# EAGLE board MP_PSU_big (EAGLE 9.7.0)
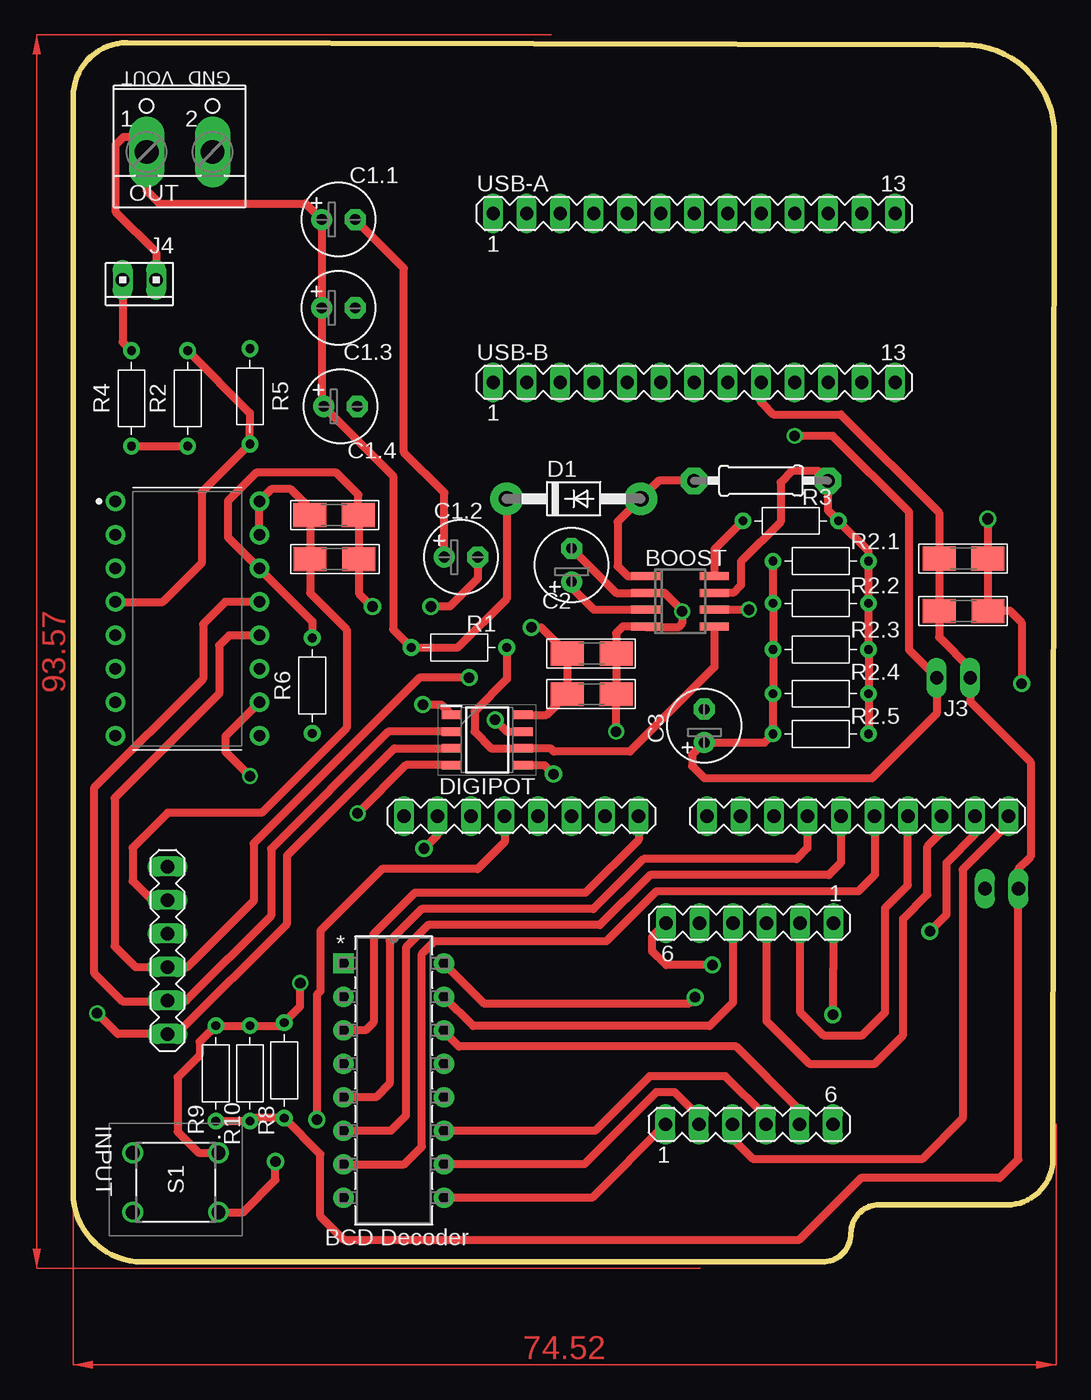
[diagram p0: board, top side]
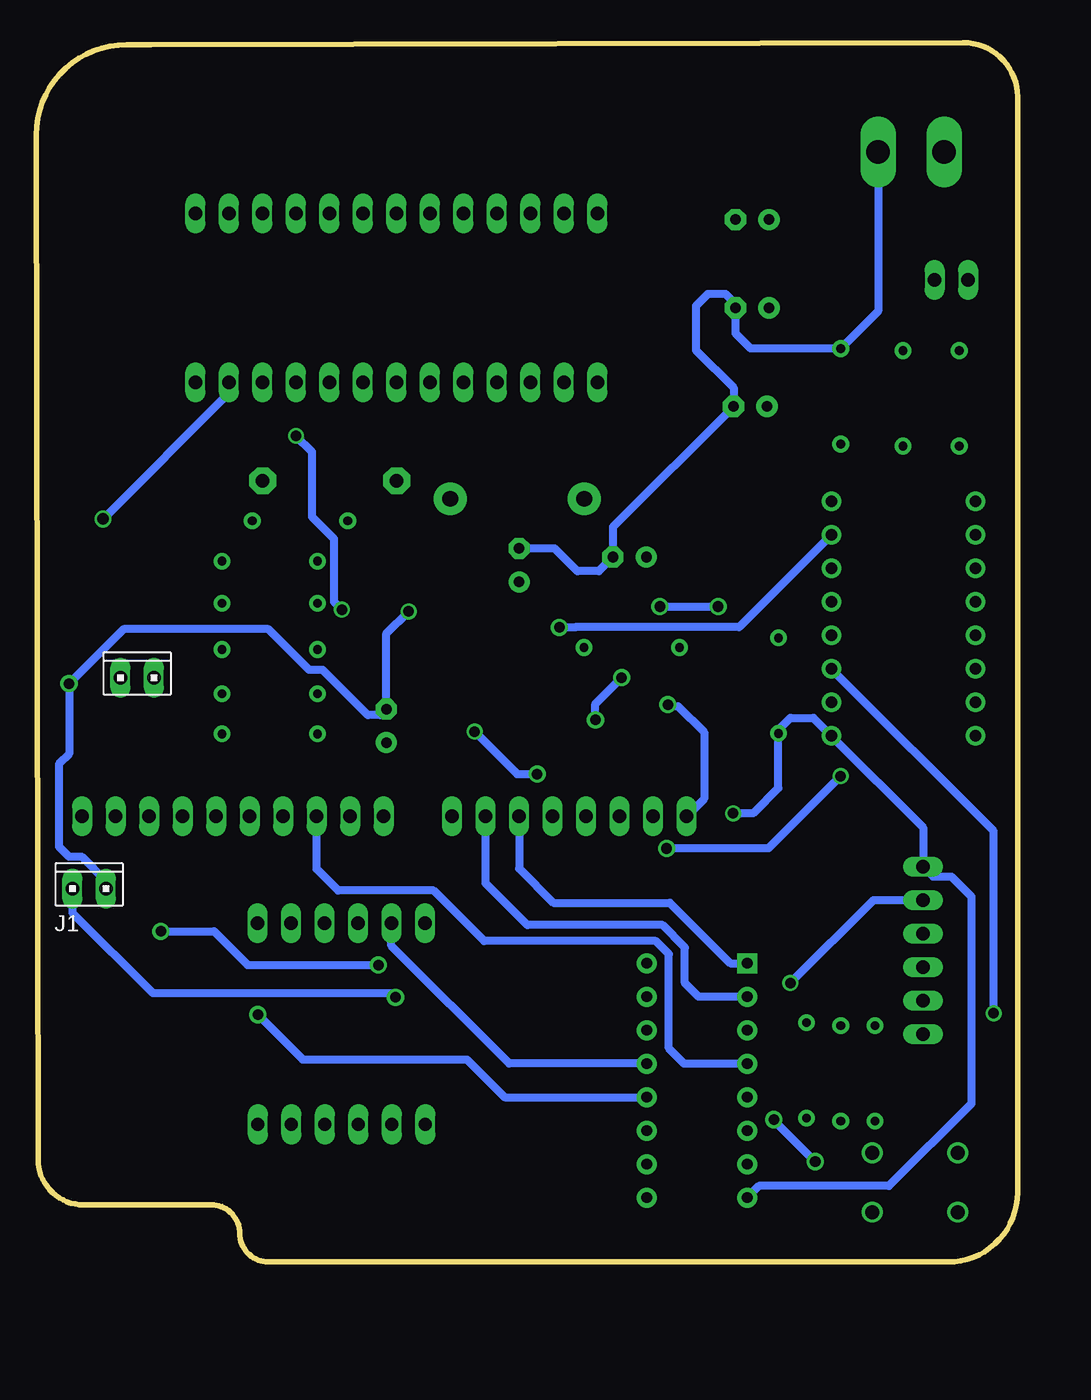
[diagram p1: board, bottom side, seen from below]

Size 74.41 x 92.48 mm. Coordinates in mm from the lower left corner, seen from the top.
Outline: 74.27,7.49 arc-90 70.51,4.35
Outline: 70.51,4.35 60.28,4.35
Outline: 70.51,4.35 61.15,4.35 arc90 58.97,2.18 arc-90 56.8,0 5.27,0 arc-90 0,5.27 0,88.37 arc-90 4.11,92.48 65.74,92.34 67.56,92.34 arc-90 74.41,85.49 74.27,7.49
Outline: 70.51,4.35 arc90 74.27,7.49
Copper layers (1*16): Top / Bottom
Stack-up Default Layer Stack: Top User Defined 0.035mm / Dielectric-1 User Defined 1.5mm / Bottom User Defined 0.035mm
Design rules "default *": minimum track width 24mil, minimum drill 0.35mm, track to track 24mil, track to pad 24mil, pad to pad 24mil, via to via 24mil, smd to smd 24mil, copper to edge 40mil, drill to drill 6mil, minimum pad ring 10mil, minimum via ring 8mil, stop-mask expansion 4mil, vias tented up to drill 0mil, thermal gap 10mil

## Footprints (pad centres in the part's own frame; a part is rotated, then mirrored left to right if it is on the bottom)
DIP1092W56P254L1905H432Q16B = drill 0.877 pad 1.477: 1 -5.46,8.89; 2 -5.46,6.35; 3 -5.46,3.81; 4 -5.46,1.27; 5 -5.46,-1.27; 6 -5.46,-3.81; 7 -5.46,-6.35; 8 -5.46,-8.89; 9 5.46,-8.89; 10 5.46,-6.35; 11 5.46,-3.81; 12 5.46,-1.27; 13 5.46,1.27; 14 5.46,3.81; 15 5.46,6.35; 16 5.46,8.89
SOIC8 = smd 0.6 x 2.2: 1 -1.905,-2.6; 2 -0.635,-2.6; 3 0.635,-2.6; 4 1.905,-2.6; 5 1.905,2.6; 6 0.635,2.6; 7 -0.635,2.6; 8 -1.905,2.6
E2,5-6 = drill 0.813 pad 1.6: + -1.27,0 | drill 0.813 pad 1.6 octagon: - 1.27,0
DO41-10 = drill 1.2 pad 2.5: A 5.08,0; C -5.08,0
C1206 = smd 2.5 x 1.8: 1 -1.85,0; 2 1.85,0
SOIC127P600X175-8N = smd 1.5 x 0.65: 1 -2.7,1.905; 2 -2.7,0.635; 3 -2.7,-0.635; 4 -2.7,-1.905; 5 2.7,-1.905; 6 2.7,-0.635; 7 2.7,0.635; 8 2.7,1.905
10X02MTA = drill 1.016 long: 1 1.27,0; 2 -1.27,0
MA08-1 = drill 1.016 long: 1 -8.89,0; 2 -6.35,0; 3 -3.81,0; 4 -1.27,0; 5 1.27,0; 6 3.81,0; 7 6.35,0; 8 8.89,0
MA10-1 = drill 1.016 long: 1 -11.43,0; 2 -8.89,0; 3 -6.35,0; 4 -3.81,0; 5 -1.27,0; 6 1.27,0; 7 3.81,0; 8 6.35,0; 9 8.89,0; 10 11.43,0
0207/10 = drill 1.016 pad 2.032 octagon: 1 -5.08,0; 2 5.08,0
W237-102 = drill 1.8 long: 1 -2.5,-1.27; 2 2.5,-1.27
RESAD724W46L381D178B = drill 0.66 pad 1.26: 1 -3.62,0; 2 3.62,0
TL1105AF160Q = drill 1.05 pad 1.575: 1 0,0; 2 0,-6.5; 3 4.5,0; 4 4.5,-6.5
MA06-1 = drill 1.016 long: 1 -6.35,0; 2 -3.81,0; 3 -1.27,0; 4 1.27,0; 5 3.81,0; 6 6.35,0
DIP16_300 = drill 0.813 pad 1.524 square: 1 -7.62,17.78 | drill 0.813 pad 1.524: 2 -7.62,15.24; 3 -7.62,12.7; 4 -7.62,10.16; 5 -7.62,7.62; 6 -7.62,5.08; 7 -7.62,2.54; 8 -7.62,0; 9 0,0; 10 0,2.54; 11 0,5.08; 12 0,7.62; 13 0,10.16; 14 0,12.7; 15 0,15.24; 16 0,17.78
MA13-1 = drill 1.016 long: 1 -15.24,0; 2 -12.7,0; 3 -10.16,0; 4 -7.62,0; 5 -5.08,0; 6 -2.54,0; 7 0,0; 8 2.54,0; 9 5.08,0; 10 7.62,0; 11 10.16,0; 12 12.7,0; 13 15.24,0

## Placement (x,y rotation side)
ADC  MCP3008  [DIP1092W56P254L1905H432Q16B]  8.66,48.8 0 top
BOOST  MC34063AD  [SOIC8]  46.02,50.11 270 top
C1.1  470uF  [E2,5-6]  20.12,79.07 0 top
C1.2  220uF  [E2,5-6]  29.41,53.47 0 top
C1.3  220uF  [E2,5-6]  20.12,72.36 0 top
C1.4  10uF  [E2,5-6]  20.27,64.9 0 top
C2  300pF  [E2,5-6]  37.8,52.86 90 top
C3  100uF  [E2,5-6]  47.85,40.67 90 top
D1  1N5819  [DO41-10]  37.95,57.89 0 top
DC1  0.1uF  [C1206]  19.81,53.31 0 top
DC2  0.1uF  [C1206]  19.78,56.65 0 top
DC3  0.1uF  [C1206]  39.32,46.15 180 top
DC5  0.1uF  [C1206]  67.51,53.35 180 top
DC6  0.1uF  [C1206]  67.52,49.38 180 top
DC-1206  0.1uF  [C1206]  39.32,43.07 180 top
DIGIPOT  MCP4162-104E_SN  [SOIC127P600X175-8N]  31.39,39.6 0 top
J1  EXPWR  [10X02MTA]  70.4,28.32 0 bottom
J2  p0  [MA08-1]  33.99,33.81 0 top
J3  [10X02MTA]  66.75,44.32 0 bottom
J4  [10X02MTA]  5.03,74.5 180 top
J6  p3  [MA10-1]  59.49,33.82 180 top
L1  18uH  [0207/10]  52.16,59.26 0 top
OUT  [W237-102]  8.08,85.47 0 top
R1  4.7k  [RESAD724W46L381D178B]  29.26,46.61 0 top
R2  330  [RESAD724W46L381D178B]  8.69,65.51 90 top
R2.1  1  [RESAD724W46L381D178B]  56.69,53.16 0 top
R2.2  1  [RESAD724W46L381D178B]  56.69,49.96 0 top
R2.3  1  [RESAD724W46L381D178B]  56.69,46.46 0 top
R2.4  1  [RESAD724W46L381D178B]  56.69,43.1 0 top
R2.5  1  [RESAD724W46L381D178B]  56.69,40.06 0 top
R3  180  [RESAD724W46L381D178B]  54.41,56.21 0 top
R4  3.3k  [RESAD724W46L381D178B]  4.42,65.51 90 top
R5  1k  [RESAD724W46L381D178B]  13.41,65.66 270 top
R6  [RESAD724W46L381D178B]  18.14,43.71 90 top
R8  1  [RESAD724W46L381D178B]  16.01,14.54 90 top
R9  10  [RESAD724W46L381D178B]  10.82,14.3 90 top
R10  10  [RESAD724W46L381D178B]  13.41,14.3 90 top
S1  TL1105AF160Q  [TL1105AF160Q]  11.03,8.28 270 top
SPI  spi  [MA06-1]  7.16,23.65 90 top
SV1  [MA06-1]  51.29,25.69 180 top
SV2  [MA06-1]  51.26,10.44 0 top
U1  BCD Decoder  [DIP16_300]  28.12,4.88 0 top
USB-A  [MA13-1]  47.09,79.53 0 top
USB-B  [MA13-1]  47.09,66.73 0 top

## Library data of the parts
ADC = IC_Data-Conversion; CATEGORY: IC_Data-Conversion; DESCRIPTION: IC ADC 10BIT SAR 16DIP; MANUFACTURER: Microchip Technology; MPN: MCP3008-I/P; OPERATINGTEMP: -40 to +85°C; PART_STATUS: Active; ROHS_COMPLIANT: Compliant; SUB-CATEGORY: A/D Converter
BOOST = mc34063
C1.1-C1.4 C2 C3 D1 DC1-DC3 DC5 DC6 DC-1206 L1 = BASIC_Components
DIGIPOT = MCP4162-104E_SN; DESCRIPTION: Digital Potentiometer 256 Step 100kOhm; HEIGHT: 1.75mm; MANUFACTURER_NAME: Microchip; MANUFACTURER_PART_NUMBER: MCP4162-104E/SN; MOUSER_PART_NUMBER: 579-MCP4162-104E/SN; MOUSER_PRICE-STOCK: https://www.mouser.co.uk/ProductDetail/Microchip-Technology-Atmel/MCP4162-104E-SN?qs=hH%252BOa0VZEiAyFbEnDIqKaA%3D%3D
J1 J3 J4 = con-amp
J2 J6 SPI = con-lstb; OC_FARNELL: unknown; OC_NEWARK: unknown
OUT = BASIC_Components; MPN: 237-102; OC_FARNELL: unknown; OC_NEWARK: 70K9898
R1 R2 R2.1-R2.5 R3-R6 R8-R10 = Resistor; CATEGORY: Resistor; SUB-CATEGORY: Fixed
S1 = TL1105AF160Q; DESCRIPTION: E-SWITCH - TL1105AF160Q - SWITCH, TACTILE SPST, 50mA, THROUGH HOLE; HEIGHT: 6.8mm; MANUFACTURER_NAME: E-Switch; MANUFACTURER_PART_NUMBER: TL1105AF160Q; MOUSER_PART_NUMBER: 612-TL1105A; MOUSER_PRICE-STOCK: https://www.mouser.co.uk/ProductDetail/E-Switch/TL1105AF160Q?qs=YXf4ACKMM4wdc4witUH7eQ%3D%3D
SV1 SV2 USB-A USB-B = con-lstb
U1 = 2023-03-22_10-19-04_Library; COPYRIGHT: Copyright (C) 2023 Ultra Librarian. All rights reserved.; MANUFACTURER_PART_NUMBER: SN7448N; MFR_NAME: Texas Instruments

## Nets
B-VIN: BOOST.6 C3.+ J3.1 R2.1.1 R2.2.1 R2.3.1 R2.4.1 R2.5.1
DCD-A: J6.5 U1.7
DCD-B: J2.6 U1.1
DCD-C: J2.7 U1.2
DCD-D: J6.6 U1.6
DCD-LT: J2.8 U1.3
DCD-RBI: J6.7 U1.5
DCD-RBO: J6.8 U1.4
DGND: ADC.9 DIGIPOT.4 R6.1 SPI.6 U1.8
DIGIPOT: BOOST.5 DIGIPOT.6 R1.2
GND: ADC.14 BOOST.2 BOOST.4 C1.2.- C1.3.- C1.4.- C2.- C3.- DC1.2 DC2.2 DC3.1 DC5.1 DC6.1 DC-1206.1 DIGIPOT.5 J1.1 OUT.2 R5.1 R6.2 USB-B.12
INT0: J2.4 S1.3
LED-1: J6.2 SV1.6
LED-2: J6.3 SV1.3
LED-3: J6.4 SV1.2
LED-A: SV1.5 U1.13
LED-B: SV1.1 U1.12
LED-C: SV2.4 U1.11
LED-D: SV2.2 U1.10
LED-DP: J6.1 SV2.3
LED-E: SV2.1 U1.9
LED-F: SV1.4 U1.15
LED-G: SV2.5 U1.14
MISO: ADC.12 DIGIPOT.7 SPI.3
MOSI: ADC.11 DIGIPOT.3 SPI.1
N$1: BOOST.7 L1.2 R2.1.2 R2.2.2 R2.3.2 R2.4.2 R2.5.2 R3.2
N$2: BOOST.8 R3.1
N$3: BOOST.1 D1.A L1.1
N$5: BOOST.3 C2.+
N$7: J4.1 R4.2
N$9: C1.1.- C1.2.+
N$10: R2.1 R4.1
N$11: ADC.4 R2.2 R5.2
SCK: ADC.13 DIGIPOT.2 SPI.2
SS: SPI.4
SS0: DIGIPOT.1 J2.1
SS1: ADC.10 J2.2
VDDR: ADC.15 ADC.16 DC1.1 DC2.1 DC3.2 DC-1206.2 DIGIPOT.8 R8.2 R9.2 R10.2 S1.1 SPI.5
VIN: DC5.2 DC6.2 J1.2 J3.2 R8.1 R9.1 R10.1 U1.16 USB-B.9
VOUT: C1.1.+ C1.3.+ C1.4.+ D1.C J4.2 OUT.1 R1.1

## Tracks (layer width: path | path; a pad name or v marks a point on that pad's centre or on a via)
B-VIN  (via drill 0.8)
  Top 0.61: R2.1.1 R2.2.1 R2.3.1 R2.4.1 R2.5.1 52.41,39.4 C3.+ 46.94,38.48 46.94,37.62 47.85,36.7 60.59,36.7 65.48,41.59 J3.1 63.38,46.42 63.38,56.89 57.61,62.66 v54.71,62.66 | BOOST.6 50.27,49.48 v51.23,49.48
  Bottom 0.61: v51.23,49.48 51.82,50.07 51.82,54.84 53.49,56.51 53.49,61.44 v54.71,62.66
DCD-A
  Top 0.61: U1.7 25.13,7.42 26.44,8.74 26.44,23.36 27.43,24.34 40.45,24.34 44.25,28.13 59.55,28.13 60.81,29.39 60.81,33.78 J6.5
DCD-B
  Bottom 0.61: J2.6 37.8,29.84 35.2,27.25 26.37,27.25 21.77,22.66 U1.1
DCD-C
  Bottom 0.61: U1.2 24.19,20.12 25.22,21.16 25.22,23.86 26.92,25.56 37.16,25.56 40.34,28.73 J2.7
DCD-D
  Top 0.61: J6.6 58.22,30.27 57.3,29.35 43.74,29.35 39.95,25.56 26.92,25.56 25.22,23.86 25.22,11.1 24.09,9.96 U1.6
DCD-LT
  Top 0.61: J2.8 42.88,32.03 38.84,28 25.91,28 22.79,24.87 22.79,18.19 22.18,17.58 U1.3
DCD-RBI
  Top 0.61: J6.7 55.68,31.39 54.86,30.57 43.24,30.57 39.44,26.78 26.42,26.78 24.01,24.37 24.01,13.54 22.97,12.5 U1.5
DCD-RBO
  Bottom 0.61: U1.4 25.28,15.04 26.44,16.21 26.44,23.36 27.43,24.34 40.45,24.34 44.28,28.17 51.51,28.17 53.14,29.8 J6.8
DGND  (via drill 0.8)
  Top 0.61: v21.57,34.03 25.24,37.69 DIGIPOT.4
  Bottom 0.61: U1.8 19.62,5.77 9.75,5.77 3.51,12.01 3.51,27.71 5.03,29.24 6.4,29.24 SPI.6 7.16,32.95 ADC.9 15.49,41.27 17.22,41.27 18.14,40.36 R6.1 18.14,35.94 20.05,34.03 v21.57,34.03
DIGIPOT
  Top 0.61: BOOST.5 48.62,45.12 42.21,38.71 36.44,38.71 36.22,38.93 34.13,38.93 DIGIPOT.6 31.7,38.96 30.44,40.22 30.44,41.77 32.88,44.21 R1.2
GND  (via drill 0.8, 0.8 pad 1.3, 0.85)
  Top 0.61: DIGIPOT.5 35.74,37.69 v36.42,37.01 | C2.- 41.17,50.75 BOOST.2 44.85,50.75 46.18,49.42 v46.18,49.35 46.18,48.44 45.87,48.13 43.5,48.13 BOOST.4 41.68,48.21 41.17,47.7 DC3.1 DC-1206.1 v41.17,40.23 | v71.92,43.87 71.92,48.5 71.04,49.38 DC6.1 DC5.1 69.34,53.37 v69.34,56.36 | C1.2.- 30.68,51.84 28.56,49.72 v27.13,49.72 | R6.2 18.14,48.59 ADC.14 11.73,54.99 11.73,57.73 13.87,59.87 19.96,59.87 21.63,58.2 DC2.2 21.66,56.63 DC1.2 21.66,50.7 22.65,49.72 v22.7,49.72
  Bottom 0.61: v69.34,56.36 59.79,65.91 USB-B.12 | v41.17,40.23 37.95,37.01 v36.42,37.01 | OUT.2 10.58,72.11 R5.1 20.23,69.28 21.39,70.43 C1.3.- 21.39,72.67 22.15,73.43 23.47,73.43 24.38,72.52 24.38,69.16 21.54,66.32 C1.4.- 30.68,55.75 C1.2.- 31.75,52.4 33.38,52.4 35.1,54.13 C2.- | J1.1 69.13,28.91 70.97,30.76 71.93,30.76 72.68,31.51 72.69,37.5 72.69,37.77 71.92,38.54 v71.92,43.87 67.79,48 56.8,48 53.71,44.91 52.7,44.91 49.26,41.48 48.31,41.48 C3.- 47.85,47.68 v46.18,49.35 | v27.13,49.72 v22.7,49.72
INT0  (via drill 0.8 pad 1.3)
  Top 0.61: S1.3 12.9,3.78 15.34,6.22 v15.34,7.61 | J2.4 32.72,31.84 30.68,29.8 23.43,29.8 18.74,25.11 18.74,20.53 18.48,20.27 v18.48,10.8
  Bottom 0.61: v18.48,10.8 18.44,10.76 18.44,10.71 v15.34,7.61
LED-1  (via drill 0.8 pad 1.3)
  Top 0.61: SV1.6 43.89,24.65 43.89,23.6 44.96,22.53 v48.46,22.53 | v64.96,25.08 66.23,26.35 66.23,30.28 68.38,32.43 J6.2
  Bottom 0.61: v64.96,25.08 60.92,25.08 58.37,22.53 v48.46,22.53
LED-2
  Top 0.61: SV1.3 52.56,18.29 55.82,15.03 60.78,15.03 62.94,17.19 62.94,26.03 64.77,27.86 64.77,31.52 65.84,32.59 J6.3
LED-3
  Top 0.61: SV1.2 55.1,18.98 56.89,17.2 59.85,17.2 61.57,18.92 61.57,26.84 63.3,28.57 J6.4
LED-A
  Bottom 0.61: U1.13 28.14,15.06 38.56,15.06 47.48,23.99 SV1.5
LED-B  (via drill 0.8 pad 1.3)
  Top 0.61: SV1.1 57.64,22.26 57.61,22.22 v57.61,18.76
  Bottom 0.61: v57.61,18.76 54.21,15.37 41.76,15.37 38.89,12.5 U1.12
LED-C
  Top 0.61: SV2.4 52.53,10.89 52.53,11.03 49.46,14.1 43.71,14.1 39.57,9.96 U1.11
LED-D
  Top 0.61: SV2.2 47.45,11.03 45.6,12.88 44.21,12.88 38.76,7.42 U1.10
LED-DP
  Top 0.61: SV2.3 49.99,9.38 51.57,7.8 64.36,7.8 67.45,10.88 67.45,29.78 68.43,30.76 68.45,30.76 70.92,33.23 J6.1
LED-E
  Top 0.61: SV2.1 39.35,4.88 U1.9
LED-F
  Top 0.61: SV1.4 50.02,23.18 50.03,23.18 50.03,19.67 48.27,17.91 30.33,17.91 U1.15
LED-G
  Top 0.61: SV2.5 55.07,11.56 50.27,16.35 29.25,16.35 28.12,17.48 U1.14
MISO  (via drill 0.8 pad 1.3)
  Top 0.61: ADC.12 11.83,47.53 11.07,46.76 11.07,43.11 3.15,35.19 3.15,23.94 4.71,22.38 SPI.3 8.69,22.38 13.69,27.38 13.69,31.74 26.27,44.32 v30.02,44.32 | v32,41.12 32.89,40.23 DIGIPOT.7
  Bottom 0.61: v32,41.12 32,42.34 v30.02,44.32
MOSI  (via drill 0.8)
  Top 0.61: v1.82,18.87 3.4,17.3 SPI.1 7.88,17.3 16.23,25.65 16.23,30.83 24.36,38.96 DIGIPOT.3
  Bottom 0.61: ADC.11 1.82,32.69 v1.82,18.87
N$1
  Top 0.61: R2.5.2 R2.4.2 R2.3.2 R2.2.2 R2.1.2 60.31,53.92 R3.2 57.24,57 L1.2 56.48,60.02 54.53,60.02 53.64,59.13 53.64,56.14 50.64,53.13 50.64,51.34 50.05,50.75 BOOST.7
N$2
  Top 0.61: R3.1 48.62,54.05 BOOST.8
N$3
  Top 0.61: L1.1 44.4,59.26 D1.A 41.29,56.15 41.29,52.78 42.05,52.02 BOOST.1
N$5
  Top 0.61: C2.+ 37.8,51.18 39.49,49.48 BOOST.3
N$7
  Top 0.61: J4.1 3.76,69.79 R4.2
N$9
  Top 0.61: C1.2.+ 28.14,58.34 25.08,61.4 25.08,75.37 C1.1.-
N$10
  Top 0.61: R4.1 R2.1
N$11
  Top 0.61: ADC.4 6.81,50.07 9.75,53.01 9.75,58.38 R5.2 13.41,63.53 13.41,64.4 R2.2
SCK
  Top 0.61: ADC.13 11.53,50.07 9.85,48.38 9.85,44.22 1.58,35.95 1.58,21.95 3.74,19.79 7.11,19.79 SPI.2 8.59,19.84 15.01,26.26 15.01,31.34 23.91,40.23 DIGIPOT.2
SS0  (via drill 0.8 pad 1.3)
  Top 0.61: v26.52,42.28 26.53,42.27 27.93,42.27 DIGIPOT.1
  Bottom 0.61: J2.1 23.77,35.13 23.77,40.19 25.75,42.17 26.52,42.17 | 26.52,42.17 | v26.52,42.28 26.52,42.17
SS1  (via drill 0.8, 0.8 pad 1.3)
  Top 0.61: v26.61,31.37 27.64,32.39 J2.2 | ADC.10 11.55,39.88 11.55,38.72 v13.41,36.86
  Bottom 0.61: v13.41,36.86 18.9,31.37 v26.61,31.37
VDDR  (via drill 0.8, 0.8 pad 1.3)
  Top 0.61: DIGIPOT.8 35.91,41.5 DC-1206.2 DC3.2 35.49,48.13 v34.75,48.13 | ADC.15 ADC.16 15.08,58.65 16.46,58.65 17.93,57.17 DC2.1 17.96,56.63 DC1.1 17.96,50.74 20.74,47.96 20.74,40.52 14.29,34.06 7.17,34.06 4.52,31.41 4.52,28.89 5.95,27.46 SPI.5 8.08,27.46 | S1.1 9.52,8.28 7.92,9.88 7.92,14.01 9.6,15.69 9.6,16.7 R9.2 R10.2 15.77,17.92 R8.2 17.22,19.37 v17.22,21.16
  Bottom 0.61: ADC.15 21.11,48.15 33.52,48.15 33.54,48.13 v34.75,48.13 | v17.22,21.16 10.92,27.46 SPI.5
VIN  (via drill 0.8 pad 1.3)
  Top 0.61: USB-B.9 52.17,65.21 53.09,64.29 58.22,64.29 65.66,56.84 DC5.2 DC6.2 65.67,47.39 68.02,45.03 J3.2 68.02,42.5 72.6,37.92 72.6,30.73 71.67,29.8 J1.2 71.67,7.79 70.26,6.38 59.74,6.38 55.02,1.65 20.57,1.65 18.75,3.48 18.75,8.18 R8.1 13.65,10.92 R10.1 R9.1 | U1.16 31.19,19.59 46.67,19.59 v47.16,20.08
  Bottom 0.61: J1.2 71.67,26.49 65.57,20.4 47.48,20.4 v47.16,20.08
VOUT
  Top 0.61: J4.2 6.3,76.58 3.2,79.68 3.2,84.71 3.81,85.32 4.46,85.32 OUT.1 5.58,81.27 6.55,80.29 17.63,80.29 C1.1.+ C1.3.+ 18.85,65.05 C1.4.+ 24.27,59.63 24.27,47.98 R1.1 29.17,46.61 32.87,50.3 D1.C
(copper drawn outside any net)
  shapes: Top area x2

## Text on the board
tNames: VOUT | GND | INPUT